# Altium PCB Dawn.PcbDoc (part 2 of 2)
Units mil, origin at the board's own origin, x right, y up, seen from the top; angles counter-clockwise.
Board outline 1650 x 2050 mil, 4 copper layers (Top Layer, Internal Plane 1, Internal Plane 2, Bottom Layer), stack 63.387 mil thick; 91 components, 58 nets, 282 pads, 207 vias.
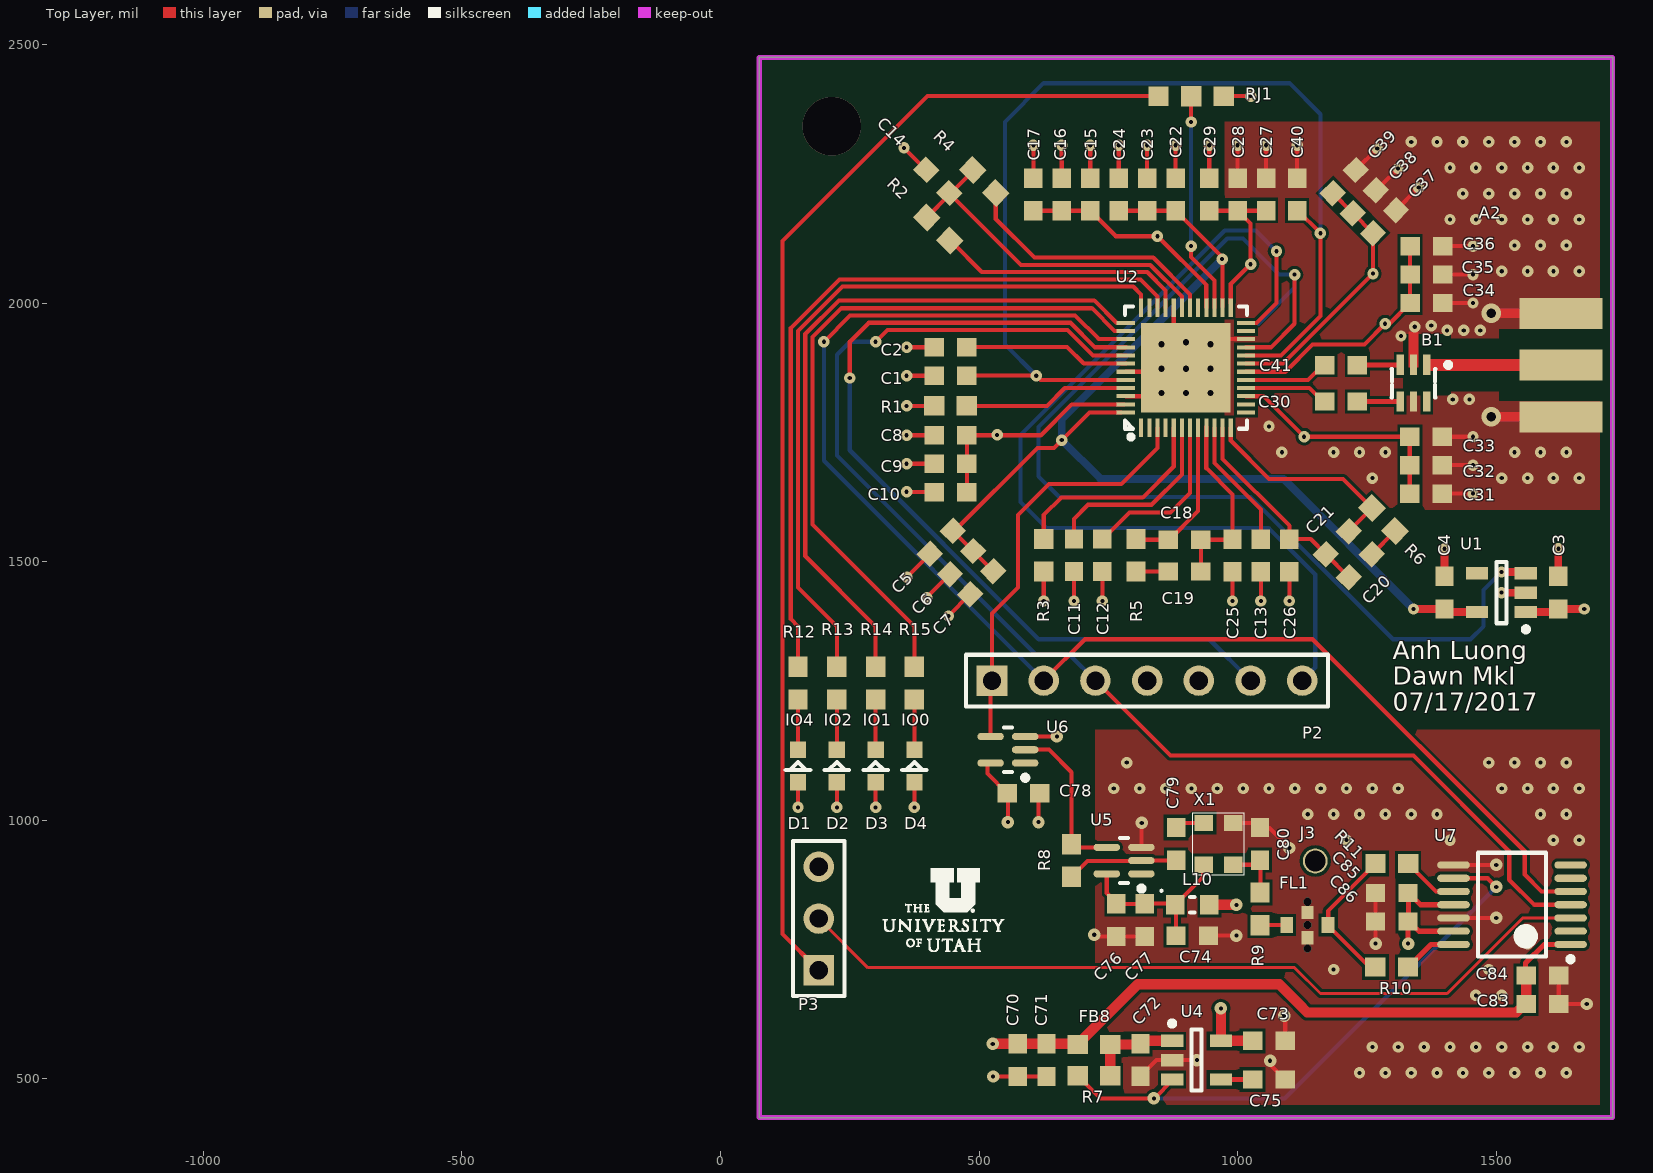
[diagram p0: Top Layer view]

## Via types
v1: diameter 22, hole 8, Top Layer to Bottom Layer, tented both sides, 171 vias
v2: diameter 24, hole 8, Top Layer to Bottom Layer, tented both sides, 21 vias
v3: diameter 23.62, hole 11.81, Top Layer to Bottom Layer, 9 vias
v4: diameter 15.75, hole 15.75, Top Layer to Bottom Layer, tented both sides, 3 vias
v5: diameter 38, hole 18, Top Layer to Bottom Layer, tented both sides, 2 vias
v6: diameter 113, hole 113, Top Layer to Bottom Layer, 1 vias

## Nets (pads, with @x,y where several pads share a name; then routed paths per layer and width w, separated by ;. In a path a pad name is that pad's centre, name@x,y a point inside that pad or via, vN(x,y) a via of type N, cw(c..) or ccw(c..) an arc to the next point about the centre after c; other vN are vias at no path point) (continued)
3V3: (continued)
  Top Layer w8: v1(150,1025) D1.1 D1.1@150,1075 ; v1(225,1025) D2.1 ; v1(300,1025) D3.1 ; v1(375,1025) D4.1 ; C9.2@475,1689.37 476.5,1687.87 C10.2 ; C8.2@475,1741.57 476.5,1740.07 C9.2 ; C8.2 v1@535,1744.37 ; U6.5@515.5,1109.28 516.13,1108.65 516.13,1090.16 C78.2 ; v1(535,1745) v1@535,1744.37 ; C78.2 555.79,1050.43 v2(555.79,996.29) ; C17.2@600,2178.5 C17.2 C16.2 C15.2@701,2178.5 ; C15.2 764.38,2129.13 v1(844.88,2129.13) 939.37,2034.64 U2.28 ; U2.47@780,1804.13 679.13,1804.13 619.37,1744.37 v1@535,1744.37 ; C29.2 993.5,2178.5 C28.2@995,2180 ; RJ1.1 v1(1025,2400) ; U2.25@986.61,2000 986.61,2036.61 v1(1025,2075) 1025,2153.5 C28.2 C27.2 ; U2.15 1050.12,1819.88 v1(1128.43,1741.57) C33.2 ; U2.18 1092.13,1867.13 1145,1920 1245,1920 v1(1285,1960) 1293.5,1960 C34.2 C35.2 C36.2 ; U2.19 1087.61,1882.87 v1(1261.59,2056.85) C37.2 C38.2 ; C39.2 C38.2@1221.39,2175 ; C33.2@1328.83,1740 1332.81,1736.02 C32.2 C31.2
  Top Layer w10: C84.2@1556.58,699.82 1556.58,723.82 1592.69,759.93 U7.1
  Top Layer w15: U1.1 1614.09,1402.6 C3.2 v1(1670,1408.5)
  Top Layer w20: v2(526.35,567.64) C70.2 C71.2@620,567.64 ; C71.2 FB8.1@691.92,567.64 ; FB8.1 FB8.1@691.92,567.64 ; C83.2@1557.66,647.59 C84.2 ; C83.2@1558,644.82 C83.2 1554.89,644.82 1538.36,628.29 1134.72,628.29 1118.19,644.82 1118.19,645.11 1080.47,682.82 807.1,682.82 FB8.1@691.92,567.64
ANT: A2.1 B1.1 | length 254.9
  Top Layer w22.84: B1.1@1370.3,1880.43 1624.57,1880.43 A2.1
C\S\: P3.2 U7.3 | length 1574.3
  Top Layer w6: P3.2 285,715 1110,715 1160,665 1405,665 1551.11,811.11 U7.3
CLK: P2.1 U2.3 U6.4 | length 812.6
  Top Layer w8: U6.4 522.33,1267.33 P2.1 525,1400 575,1450 575,1590 635,1650 775,1650 844.88,1719.88 U2.3
EXTON: U1.3 U2.21 | length 2267.4
  Top Layer w8: U2.21 1064.37,1914.37 1110,1960 v1(1110,2055)
  Top Layer w15: v1(1510,1480) U1.3@1555,1480
  Bottom Layer w8: 1040,1960 1110,2030 v1(1110,2055) 1080,2055 1010,2125 979.8,2125 615,1760.2 615,1665 655,1625 1025,1625 1300,1350 1450,1350 1475,1375 1475,1445 v1(1510,1480)
GND: A2.2 A2.3 A2.4 A2.5 B1.2 B1.5 C1.1 C2.1 C3.1 C4.1 C5.1 C6.1 C7.1 C8.1 C9.1 C10.1 C11.1 C12.1 C13.1 C14.1 C15.1 C16.1 C17.1 C22.1 C23.1 C24.1 C25.1 C26.1 C27.1 C28.1 C29.1 C31.1 C32.1 C33.1 C34.1 C35.1 C36.1 C37.1 C38.1 C39.1 C40.1 C72.1 C73.1 C74.1 C75.1 C76.1 C77.1 C78.1 C80.1 C83.1 C84.1 C85.1 C86.1 FL1.2 P2.5 P3.3 R1.2 R3.1 U1.2 U2.22 U2.32 U2.43 U2.46 U2.49 U4.2 U5.3 U6.3 U7.8 U7.12 X1.2 | length 3502.1
  Top Layer w8: v1(355,2300) C14.1 ; v1(360,1635) 360.63,1634.37 C10.1 ; v1(360,1689.37) C9.1 ; v1(360,1744.37) C8.1 ; v1(360,1801.2) R1.2 ; v1(360,1859.37) C1.1 ; v1(360,1914.37) C2.1 ; v1(360.63,1470) 360.63,1470.56 C5.1 ; v1(399.2,1430) 399.2,1431.35 C6.1 ; v1(440.81,1395) 440.81,1395.18 C7.1 ; U6.3 v2(650.59,1161.88) ; C17.1 v1(605,2305) ; v2(615,996.29) 615,1049.71 C78.1 ; v1(624.97,1423.9) R3.1 ; C16.1 v1(660,2305) ; v1(683.48,1423.9) C11.1 ; C15.1 v1(715,2305) ; v2(722.72,778.73) 726.19,775.26 C76.1 ; v1(738.48,1423.9) C12.1 ; C76.1@768.72,778.48 771.94,775.26 825.1,775.26 C77.1@825.64,775.8 ; C24.1 v1(770,2305) ; U2.46 839.88,1819.88 U2.49@840,1820 ; U2.43 U2.49@839.88,1867.13 ; C72.1 843.41,536.14 U4.2@872.19,536.14 ; U5.3 v2@813.87,994.16 ; v2@813.87,995.16 v2@813.87,994.16 ; v2(814.51,994.8) v2@813.87,994.16 ; C23.1 v1(825,2305) ; U4.2 921.34,536.14 v2(921.2,536.29) ; U2.49@875,1935 876.38,1936.38 U2.32 ; C22.1 v1(880,2305) ; C29.1 v1(945,2305) ; C74.1@945.68,776.88 v2(997.48,776.88) ; U2.49@960,1930 960.12,1930.12 U2.22 ; v1(989.89,1423.9) C25.1 ; X1.2@991.97,994.8 1033.07,994.8 1043.06,984.82 1061.47,984.82 v2(1100,946.29) ; C28.1 v1(1000,2305) ; v1(1044.89,1423.9) 1045,1424 C13.1@1045,1485 ; C27.1 v1(1055,2305) ; v2(1062.78,534.98) 1062.78,527.8 C75.1 ; v2(1090,621.94) 1092.01,619.94 C73.1 ; v1(1099.89,1423.9) 1100,1424 C26.1@1100,1485 ; C40.1 v1(1115,2305) ; C39.1 v1(1270,2298.78) ; C85.1@1266.41,853.91 C86.1 1266.41,761.63 v2(1266.58,761.46) ; C38.1 1268.24,2218.24 v1(1310,2260) ; C37.1 v1(1350,2223.22) ; C31.1 v1(1455,1631.57) ; C32.1 v1(1455,1686.57) ; C33.1 v1(1455,1741.57) ; C34.1 v1(1455,2000) ; C35.1 v1(1455,2055) ; C36.1 v1(1455,2110) ; U7.12 v2(1500,811.11) ; U7.8 1499.76,913.48 v2(1500,913.71) ; C83.1 v2(1675,644.82) ; C83.1@1620.65,645.47 C84.1
  Top Layer w15: C4.1 v1(1400,1525) ; v1(1510,1440) U1.2 ; C3.1 v1(1620,1525)
  other v1: 1235.5,511.5 1285.5,511.5 1335.5,511.5 1385.5,511.5 1435.5,511.5 1485.5,511.5 1535.5,511.5 1585.5,511.5 1635.5,511.5 1260.5,561.5 1310.5,561.5 1360.5,561.5 1410.5,561.5 1460.5,561.5 1510.5,561.5 1560.5,561.5 1610.5,561.5 1660.5,561.5 1460.5,661.5 1510.5,661.5 1185.5,711.5 1485.5,711.5 1560.5,761.5 1210.5,961.5 1410.5,961.5 1610.5,961.5 1660.5,961.5 1135.5,1011.5 1185.5,1011.5 1235.5,1011.5 1285.5,1011.5 1335.5,1011.5 1385.5,1011.5 1585.5,1011.5 1635.5,1011.5 760.5,1061.5 810.5,1061.5 860.5,1061.5 910.5,1061.5 960.5,1061.5 1010.5,1061.5 1060.5,1061.5 1110.5,1061.5 1160.5,1061.5 1210.5,1061.5 1260.5,1061.5 1310.5,1061.5 1510.5,1061.5 1560.5,1061.5 1610.5,1061.5 1660.5,1061.5 785.5,1111.5 1485.5,1111.5 1535.5,1111.5 1585.5,1111.5 1635.5,1111.5 1260.5,1661.5 1510.5,1661.5 1560.5,1661.5 1610.5,1661.5 1660.5,1661.5 1085.5,1711.5 1185.5,1711.5 1235.5,1711.5 1285.5,1711.5 1535.5,1711.5 1585.5,1711.5 1635.5,1711.5 1060.5,1761.5 1415.88,1813.82 1447.88,1813.82 1315.85,1936.27 1405.01,1947.05 1437.01,1947.05 1469.01,1947.05 1342.48,1954.01 1374.39,1956.35 1510.5,2061.5 1560.5,2061.5 1610.5,2061.5 1660.5,2061.5 1535.5,2111.5 1585.5,2111.5 1635.5,2111.5 1410.5,2161.5 1460.5,2161.5 1510.5,2161.5 1560.5,2161.5 1610.5,2161.5 1660.5,2161.5 1435.5,2211.5 1485.5,2211.5 1535.5,2211.5 1585.5,2211.5 1635.5,2211.5 1410.5,2261.5 1460.5,2261.5 1510.5,2261.5 1560.5,2261.5 1610.5,2261.5 1660.5,2261.5 1335.5,2311.5 1385.5,2311.5 1435.5,2311.5 1485.5,2311.5 1535.5,2311.5 1585.5,2311.5 1635.5,2311.5
  other v3: 852.76,1825.79 900,1825.79 947.24,1825.79 852.76,1873.03 900,1873.03 947.24,1873.03 852.76,1920.28 947.24,1920.28 900,1924.21
  other v4: 1135,752 1135,797.28 1135,842.55
  other v5: 1490,1780 1490,1980
GND_RDO: C70.1 C71.1 | length 103.4
  Top Layer w8: v2(527.31,504.65) C70.1 628.35,504.65 C71.1@630,506.3
GPIO0_R: R15.2 U2.38 | length 1366.5
  Top Layer w8: R15.2 375,1375 178,1572 178,1934.11 233.89,1990 718.01,1990 762.14,1945.87 U2.38
GPIO1_R: R14.2 U2.37 | length 1364.5
  Top Layer w8: R14.2 300,1375 164,1511 164,1939.91 229.09,2005 722.81,2005 766.19,1961.61 U2.37
GPIO2_R: R13.2 U2.36 | length 1411.1
  Top Layer w8: R13.2 225,1375 150,1450 150,1945.71 236.1,2031.81 798.19,2031.81 813.39,2016.61 U2.36
GPIO3: U2.35
GPIO4_R: R12.2 U2.34 | length 1444.1
  Top Layer w8: R12.2 150,1375 136,1389 136,1951.51 230.3,2045.81 811.93,2045.81 844.88,2012.86 U2.34
GPIO5: R2.1 U2.33 | length 492.1
  Top Layer w8: R2.1@448.38,2125 448.38,2116.62 505.19,2059.81 825.17,2059.81 860.63,2024.35 U2.33
GPIO6: R4.1 U2.30 | length 508.9
  Top Layer w8: R4.1@532.27,2210 532.27,2162.73 607.19,2087.81 836.77,2087.81 907.87,2016.71 U2.30
IRQ: R1.1 U2.45 | length 320.4
  Top Layer w8: R1.1@477.73,1801.2 631.2,1801.2 665.63,1835.63 U2.45
NetB1_3: B1.3 C41.1 | length 80.8
  Top Layer w10: C41.1 B1.3@1312.28,1880
NetB1_4: B1.4 C30.1 | length 82.9
  Top Layer w10: C30.1 B1.4
NetC14_2: C14.2 R2.2 R4.2 U2.31 | length 674.1
  Top Layer w8: R2.2 442.27,2208.88 C14.2@442.27,2210 ; R4.2@490,2257.27 445.46,2212.73 C14.2 581.19,2073.81 830.97,2073.81 892.13,2012.66 U2.31@892.13,2000
NetC18_2: C18.2 R5.2 U2.8 | length 309.7
  Top Layer w8: R5.2@800,1545 802.6,1542.4 C18.2 ; C18.2@865.81,1540 923.62,1597.81 U2.8
NetC19_1: C19.1 R5.1 | length 67.1
  Top Layer w8: R5.1 C19.1 868.48,1480.91 C19.1@869.97,1482.4
NetC20_1: C20.1 R6.1 | length 64.3
  Top Layer w8: C20.1 R6.1 R6.1@1304.5,1560
NetC21_1: C21.1 R6.2 U2.12 | length 415
  Top Layer w8: U2.12 986.61,1734.25 1060.87,1660 1203.37,1660 R6.2@1259.6,1603.78 ; C21.1@1215,1559.42 1259.35,1603.78 R6.2@1259.6,1603.78 ; R6.2 R6.2@1259.6,1603.78
NetC30_2: C30.2 U2.16 | length 163
  Top Layer w8: U2.16@1020,1835.63 1138.5,1835.63 C30.2@1170,1804.13
NetC41_2: C41.2 U2.17 | length 162
  Top Layer w8: U2.17@1015,1851.38 U2.17 1135.94,1851.38 C41.2@1165,1880.43
NetC72_2: C72.2 FB8.2 R7.2 U4.1 | length 184.5
  Top Layer w20: FB8.2@750.87,567.03 753.57,564.33 R7.2 ; FB8.2 809.04,566.3 816.29,573.55 U4.1
NetC74_2: C74.2 C76.2 C77.2 L10.1 U5.5 X1.4 | length 320.4
  Top Layer w8: U5.5 746.94,859.06 C76.2@760,846 ; C76.2 819.12,838.25 819.66,838.79 872.07,838.79 L10.1@872.61,838.25 ; L10.1 933.16,890.6 X1.4@933.16,913.48 ; C74.2 L10.1@880.73,833.87 ; X1.4@934.51,913.71 X1.4@934.9,914.09
NetC75_2: C75.2 U4.4 | length 62.5
  Top Layer w10: U4.4 C75.2
  Top Layer w20: C75.2 C75.2@1030.28,498.74
NetC79_1: C79.1 X1.3 | length 44.4
  Top Layer w8: C79.1@890.07,994.8 X1.3
NetC79_2: C79.2 R8.1 U5.2 | length 210
  Top Layer w8: R8.1 709.55,921.29 814.51,921.29 815.2,921.98 C79.2@875.69,921.98
NetC80_2: C80.2 R9.2 X1.1 | length 107.5
  Top Layer w8: X1.1 C80.2@1036.15,914.09 ; C80.2 1044.08,921.93 R9.2@1044.08,860.42
NetD1_2: D1.2 R12.1 | length 97
  Top Layer w8: D1.2@150,1140 R12.1@150,1237.01
NetD2_2: D2.2 R13.1 | length 104.1
  Top Layer w8: D2.2@220,1135 225,1140 R13.1@225,1237.01
NetD3_2: D3.2 R14.1 | length 102
  Top Layer w8: D3.2@300,1135 R14.1@300,1237.01
NetD4_2: D4.2 R15.1 | length 102.6
  Top Layer w8: R15.1@375,1237.01 R15.1 375,1141.5 D4.2@380,1136.5
NetFL1_1: FL1.1 R10.2 R11.2 | length 282.5
  Top Layer w8: R10.2 1255.02,716.13 1175,796.15 1175,824.71 R11.2
NetFL1_3: FL1.3 R9.1 | length 43.9
  Top Layer w8: R9.1 FL1.3@1087,797.28
NetP3_1: P3.1 RJ1.3 | length 2282
  Top Layer w8: P3.1 120,780 120,2120 400,2400 RJ1.3
NetR3_2: R3.2 U2.5 | length 411.7
  Top Layer w8: R3.2@624.97,1543.61 R3.2 624.97,1589.97 659,1624 816.57,1624 876.38,1683.81 U2.5
NetR8_2: R8.2 U5.4 U6.2 | length 312.1
  Top Layer w8: U6.2@590,1136.58 634.96,1136.58 678.74,1092.79 R8.2 ; R8.2@681.01,947.57 U5.4
NetR10_1: R10.1 U7.14 | length 90.9
  Top Layer w10: R10.1@1327.42,721.35 1335.06,721.35 1373.65,759.93 U7.14@1402.31,759.93
NetR11_1: R11.1 U7.10 | length 112.4
  Top Layer w8: R11.1@1327.42,916.29 R11.1@1328.5,915.21 ; R11.1@1329.23,916.29 R11.1@1329.4,916.12 ; R11.1 1383.56,862.29 U7.10 U7.10@1417.88,862.29
OSC_EN: R7.1 U4.3 U7.9 | length 1139.1
  Top Layer w8: R7.1 734.57,462.31 v2(837.99,462.31) 838.92,462.31 U4.3@875.36,498.74 ; U7.9 1483.4,887.89 v2(1500,871.29)
  Bottom Layer w8: v2(837.99,462.31) 1091.02,462.31 v2(1500,871.29)
RESET: RJ1.2 U2.27 | length 427.5
  Top Layer w8: v1(910,2110) 910,2088.83 955.12,2043.71 U2.27 ; v1(910,2350) RJ1.2
  Bottom Layer w8: v1(910,2110) v1(910,2350)
SCLK: P2.3 U2.41 U7.4 | length 2604.6
  Top Layer w8: v1(300,1925) 322.81,1947.81 670.87,1947.81 720.06,1898.62 U2.41 ; P2.3 870,1125 1340,1125 1525,940 1525,885 1573.3,836.7 U7.4
  Bottom Layer w8: v1(300,1925) 250,1925 225,1900 225,1705 610,1320 675,1320 P2.3
SDI: P2.2 U2.39 U7.5 | length 2735.1
  Top Layer w8: v1(200,1925) 250.81,1975.81 685.8,1975.81 731.5,1930.12 U2.39 ; P2.2 705,1350 1145,1350 1555,940 1555,895 1587.71,862.29 U7.5
  Bottom Layer w8: v1(200,1925) 200,1695 P2.2
SPI_CS_EX: P2.7 U2.24 | length 1823.3
  Top Layer w8: U2.24 1036.61,1961.61 1075,2000 v1(1075,2100)
  Bottom Layer w8: v1(1075,2100) 1035,2140 975,2140 580,1745 580,1615 630,1565 1060,1565 1150,1475 1150,1295 P2.7
SPI_MISO: P2.6 U2.40 | length 1737.9
  Top Layer w8: v1(250,1855) 250,1925 286.81,1961.81 676.66,1961.81 724.09,1914.39 731.5,1914.39 ; 731.51,1914.37 U2.40
  Bottom Layer w8: v1(250,1855) 250,1715.3 615.3,1350 945,1350 P2.6
SYNC: U2.29
VCC_OSC: C73.2 C85.2 C86.2 J3.1 L10.2 U4.5 U7.11 U7.13 | length 440.6
  Top Layer w10: v2(1329.4,761.46) C86.2 ; C85.2@1330,860.27 C85.2@1330.21,860.05 ; C85.2@1330.21,861.48 C85.2@1330.21,860.05 ; U7.13@1402.31,785.52 1350.58,785.52 1330.21,805.89 C85.2@1330.21,860.05 ; U7.11@1402.31,836.7 1353.56,836.7 C85.2@1330.21,860.05
  Top Layer w20: L10.2 v2(997.48,836.4) ; v2(967.48,636.29) 967.75,636.29 U4.5 1028.35,573.55 C73.2@1031.09,576.29
VDDCLK: C18.1 C19.2 C25.2 U2.9 | length 362.8
  Top Layer w8: C18.1@925,1543.61 928.8,1539.8 C19.2 ; C18.1 C25.2@990,1542.4 ; U2.9@939.37,1760 U2.9 939.37,1680.63 989.89,1630.11 C25.2
VDDDIG: C1.2 C40.2 U2.20 U2.44 | length 2122.3
  Top Layer w8: C1.2@476.5,1860 610,1860 v1(610.63,1859.37) 618.62,1851.38 U2.44 ; U2.20 1083.56,1898.62 1160,1975.06 v1(1160,2135) C40.2@1115,2180
  Bottom Layer w8: v1@610,1859.37 v1(610.63,1859.37) 550,1920 550,2350 625,2425 1100,2425 1160,2365 v1(1160,2135)
VDDIF: C12.2 U2.7 | length 332.9
  Top Layer w8: C12.2@738.48,1542.4 791.08,1595 870,1595 907.87,1632.87 U2.7
VDDIO: C2.2 U2.42 | length 320.7
  Top Layer w8: C2.2@476.5,1915 670.25,1915 702.38,1882.87 U2.42
VDDMS: C11.2 U2.6 | length 367.1
  Top Layer w8: C11.2@683.48,1550 683.48,1582.67 710.8,1610 833.48,1610 892.13,1668.65 U2.6
VDDSYN: C13.2 U2.10 | length 253.7
  Top Layer w8: U2.10 955.12,1690.75 1045,1600.87 C13.2@1045,1542.4
VDDVCO: C20.2 C21.2 C26.2 U2.11 | length 413.3
  Top Layer w8: U2.11 970.87,1698.5 1099.89,1569.48 C26.2 1141.27,1543.61 C21.2@1170,1514.88 ; C21.2 1214.28,1470.56 C20.2@1215,1470.56
WAKEUP: U2.23
pads on no net: B1.6 RJ1.5 U1.4 U2.1 U2.2 U2.4 U2.13 U2.14 U2.Paste1 U2.Paste2 U2.Paste3 U2.Paste4 U2.Paste5 U2.Paste6 U2.Paste7 U2.Paste8 U2.Paste9 U5.1 U6.1 U7.2 U7.6 U7.7 X1.5
copper on no net:
  other v6: 215.5,2341.5

## Polygon pours and split planes (outlines as drawn)
GND on Bottom Layer "GND_L04_P010" (solid, remove dead copper, pour order 10): -3239.5,-2738.5
GND on Bottom Layer "GND_L04_P022" (solid, remove dead copper, pour order 22): -3239.5,-2738.5
GND on Bottom Layer "GND_L04_P024" (solid, remove dead copper, pour order 24): -3239.5,-2738.5
GND on Bottom Layer "GND_L04_P068" (solid, remove dead copper, pour order 68): 725,450 1700,450 1700,1175 725,1175
GND on Bottom Layer "GND_L04_P070" (solid, remove dead copper, pour order 70): 1700,1600 975,1600 975,2350 1700,2350
GND on Top Layer "GND_L01_P008" (solid, remove dead copper, pour order 8): -3239.5,-2738.5
GND on Top Layer "GND_L01_P012" (solid, remove dead copper, pour order 12): -3239.5,-2738.5
GND on Top Layer "GND_L01_P020" (solid, remove dead copper, pour order 20): -3239.5,-2738.5
GND on Top Layer "GND_L01_P066" (solid, remove dead copper, pour order 66): 725,1175 1700,1175 1700,450 725,450
GND on Top Layer "GND_L01_P072" (solid, remove dead copper, pour order 72): 975,2350 1700,2350 1700,1600 975,1600
GND on Internal Plane 1 (split plane): 1704.9,445.1 95.1,445.1 95.1,2454.9 1704.9,2454.9
VCC_OSC on Internal Plane 2 (split plane): 1704.9,445.1 720.1,445.1 720.1,1179.9 1704.9,1179.9
3V3 on Internal Plane 2 (split plane): 1704.9,1220.1 700,1220.1 696.08,1219.71 692.31,1218.57 688.83,1216.71 685.79,1214.21 683.29,1211.17 681.43,1207.69 680.29,1203.92 679.9,1200 679.9,445.1 95.1,445.1 95.1,2454.9 1704.9,2454.9

## Keep-outs
Keep-Out Layer:
  the board outline again, w10

## Other copper
Top Layer:
  rectangle net GND: 1330,1875 1350,1945
Bottom Layer:
  pour cut-out: -1239.5,2261.5
  pour cut-out: -1239.5,2261.5
Internal Plane 2 (plane layer: these items are gaps in the copper):
  lines w40: 700,425 700,1200 1725,1200

## Silkscreen, mask and mechanical layers (free items; w line width, h text height)
Top Overlay:
  drawing of 818 lines, arcs and shapes, not listed
  text "Anh Luong" at 1300,1300 h60
  text "Dawn MkI" at 1300,1250 h60
  text "07/17/2017" at 1300,1200 h60
  text "IO4" at 125,1175 h40
  text "IO2" at 200,1175 h40
  text "IO1" at 275,1175 h40
  text "IO0" at 350,1175 h40
Mechanical 3:
  the board outline again, w10
Mechanical 14:
  circle w37.5: c215.5,2341.5 r56.5
  lines w40: 0,0 0,2558 1806,2558 1806,0 0,0

## Dimensions
75,425 to 75,2475 on Mechanical 1
75,425 to 1725,425 on Mechanical 1